# Allegro board BACKUP.brd
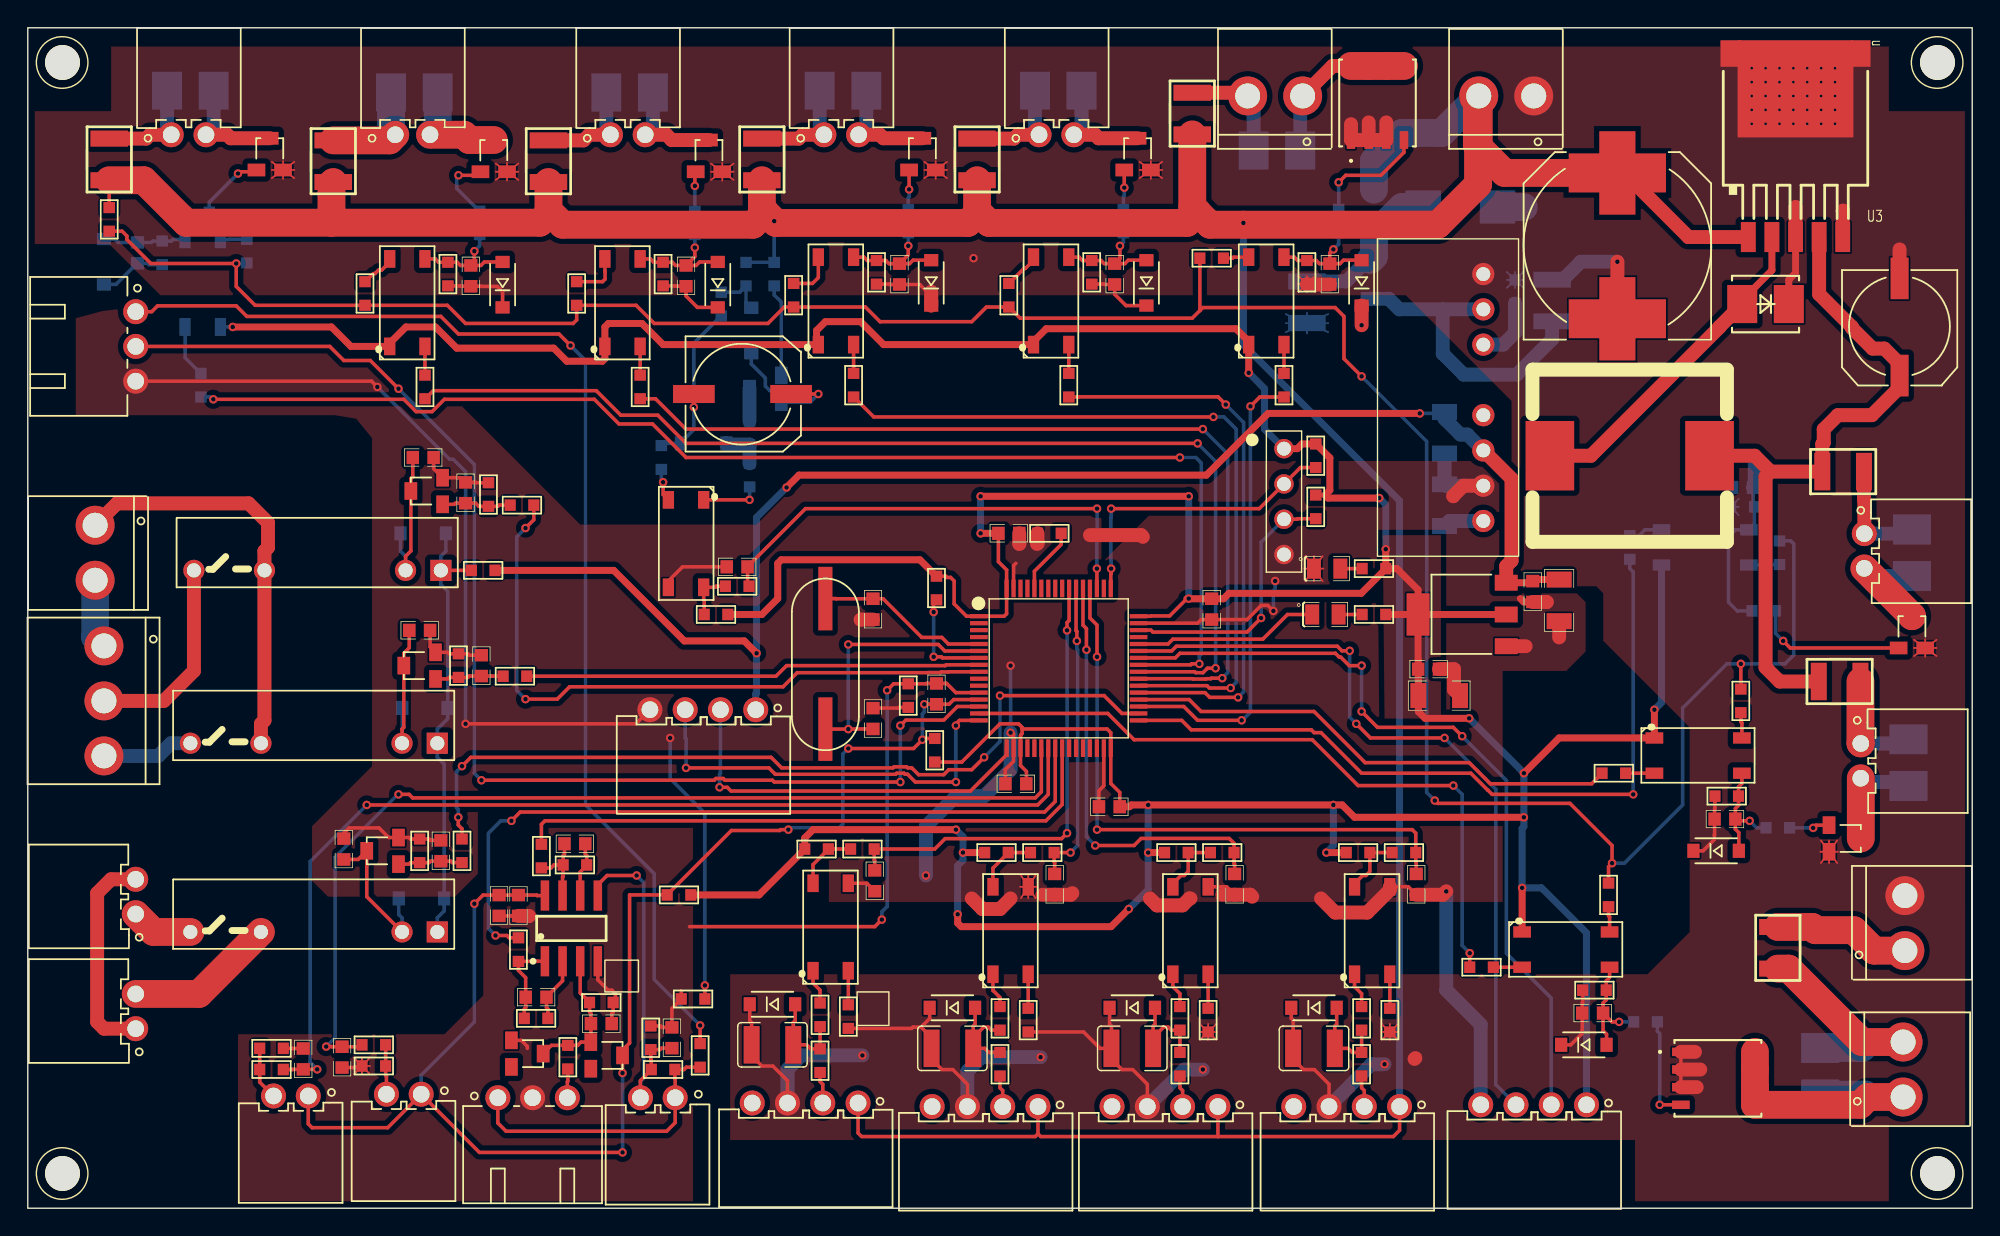
[diagram p0: board, top side]
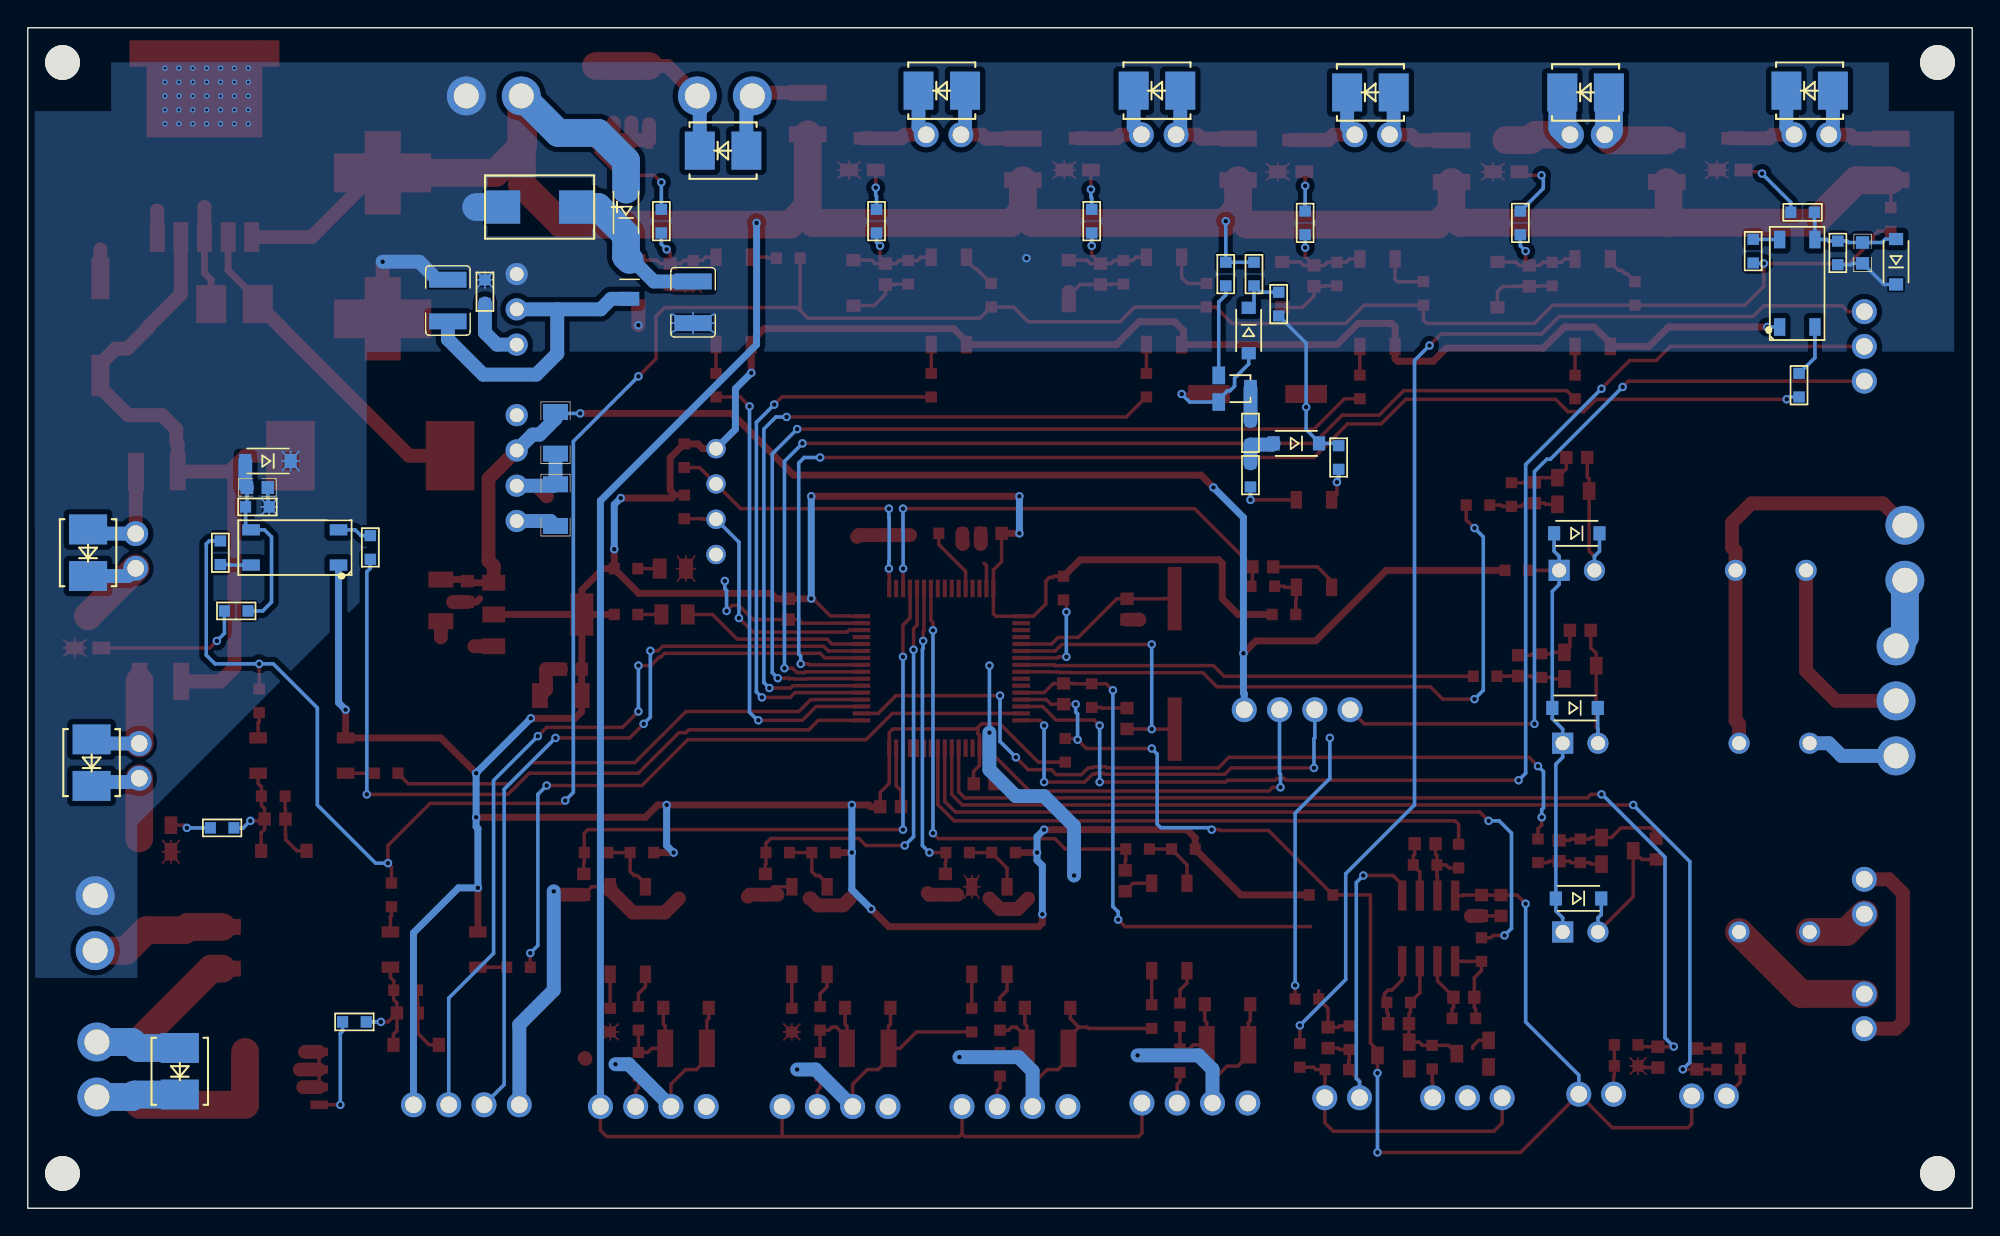
[diagram p1: board, bottom side, seen from below]

Outline 140 x 85 mm; copper layers: TOP, BOTTOM. Coordinates in mm from the lower left corner of the outline.
Outline path: rectangle 0,0 140,85

## Design rules (mm)
constraint set DEFAULT: min track width 0.127

## Placement (name value [footprint] x y rotation side)
C1  10u  [CTASMDCD_A_EC2917_EA7343_31]  103.15 72.09 0 bottom
C2  10u  [C1210]  92.1 65.23 270 bottom
C3  1uF/10%/50V  [C1210]  109.75 65.36 90 bottom
C4  100u/16V  [C1206]  102 55.84 270 bottom
C5  10uF/10%/35V  [C1206]  110.26 43.77 270 top
C6  100nF/10%/35V  [C0603]  108.35 44.41 270 top
C7  10uF/10%/35V  [C1206]  101.62 36.91 0 top
C8  100nF/10%/35V  [C0603]  100.86 38.82 0 top
C9  10uF/10%/35V  [C1206]  102 50.63 90 bottom
C10  470uF/50V  [CES13]  114.45 69.3 270 top
C11  220uF/25V  [CES8]  134.77 63.45 90 top
C12  100nF/10%/35V  [C0603]  77.87 28.91 180 top
C13  100nF/10%/35V  [C0603]  70.64 48.6 0 top
C14  100nF/10%/35V  [C0603]  85.24 43.13 270 top
C15  100nF/10%/35V  [C0603]  71.14 30.56 180 top
C16  22pF/10%/50V  [C0603]  60.86 43.13 90 top
C17  22pF/10%/50V  [C0603]  60.86 35.26 270 top
C22  100nF/10%/50V  [C0603]  65.43 37.04 90 top
C23  100nF/10%/35V  [C0603]  7.9 68.79 270 bottom
C24  100nF/10%/35V  [C0603]  31.9 67.14 270 top
C25  100nF/10%/35V  [C0603]  47.39 67.14 270 top
C26  100nF/10%/35V  [C0603]  62.76 67.27 270 top
C27  100nF/10%/35V  [C0603]  78.25 67.27 270 top
C28  100nF/10%/35V  [C0603]  122.2 28.02 180 top
C29  100nF/10%/35V  [C0603]  123.47 51.9 180 bottom
C30  100nF/10%/35V  [C0603]  93.75 67.27 270 top
C31  100nF/10%/35V  [C0603]  112.67 14.05 180 top
C32  100nF/10%/35V  [C0603]  22.76 25.86 90 top
C33  100nF/10%/35V  [C0603]  29.74 25.74 90 top
C34  100nF/10%/35V  [C0603]  28.47 54.06 0 top
C35  100nF/10%/35V  [C0603]  28.22 41.61 0 top
C36  100nF/10%/35V  [C0603]  31.52 51.52 90 top
C37  100nF/10%/35V  [C0603]  32.66 39.07 90 top
C38  22nF/10%/50V  [C1210]  53.62 11.77 0 top
C39  10nF/10%/50V  [C0603]  60.98 23.58 270 top
C40  22nF/10%/50V  [C1210]  66.57 11.51 0 top
C41  10nF/10%/50V  [C0603]  73.94 23.32 270 top
C42  220uF/25V  [CES8]  51.46 58.63 180 top
C43  10nF/10%/50V  [C0603]  51.08 46.18 180 top
C44  22pF  [C0603]  36.6 15.2 180 top
C45  1uF/10%/16V  [C0603]  33.93 21.8 270 top
C46  10nF/10%/50V  [C0603]  35.33 21.8 270 top
C47  22pF  [C0603]  41.3 13.29 180 top
C48  22pF  [C0603]  39.39 26.24 180 top
C49  22pF  [C0603]  46.38 12.27 270 top
C50  22pF  [C0603]  22.63 10.88 90 top
C51  22pF  [C0603]  19.84 10.75 270 top
C52  22nF/10%/50V  [C1210]  79.53 11.51 0 top
C53  10nF/10%/50V  [C0603]  86.89 23.32 270 top
C54  22nF/10%/50V  [C1210]  92.61 11.51 0 top
C55  10nF/10%/50V  [C0603]  99.97 23.32 270 top
D1  1N4007W  [SOD-123]  96.92 71.71 90 bottom
D2  SS54  [DO-214AA]  125.12 65.11 180 top
D3  GREEN  [LED0805]  92.61 46.06 0 top
D4  GREEN  [LED0805]  92.48 42.75 0 top
D5  SS34  [DO-214AA]  11.71 80.47 180 bottom
D6  SS34  [DO-214AA]  27.84 80.35 180 bottom
D7  SMF11CA  [SOD-123]  5.48 68.15 90 bottom
D8  SMF11CA  [SOD-123]  34.19 66.5 90 top
D9  SS34  [DO-214AA]  43.33 80.35 180 bottom
D10  SS34  [DO-214AA]  58.7 80.47 180 bottom
D11  SS34  [DO-214AA]  74.19 80.47 180 bottom
D12  SMF11CA  [SOD-123]  49.68 66.5 90 top
D13  SMF11CA  [SOD-123]  65.05 66.63 90 top
D14  SMF11CA  [SOD-123]  80.54 66.63 90 top
D15  SS34  [DO-214AA]  135.41 32.09 90 bottom
D16  SS34  [DO-214AA]  135.66 47.2 90 bottom
D17  SS34  [DO-214AA]  89.94 76.16 180 bottom
D18  SMF11CA  [SOD-123]  121.56 25.74 0 top
D19  SMF11CA  [SOD-123]  122.7 53.8 0 bottom
D20  SMF11CA  [SOD-123]  96.03 66.63 90 top
D21  MBR0540  [SOD-123]  28.34 22.31 0 bottom
D22  MBR0540  [DO-214AA]  129.06 9.86 90 bottom
D23  SMF11CA  [SOD-123]  112.04 11.77 0 top
D24  MBR0540  [SOD-123]  28.47 48.6 0 bottom
D25  MBR0540  [SOD-123]  28.6 36.02 0 bottom
D26  SMBJ7.5CA  [SOD-123]  53.62 14.69 0 top
D27  SMBJ7.5CA  [SOD-123]  66.57 14.43 0 top
D28  4148  [SOD-123]  52.09 63.2 270 bottom
D29  SMBJ7.5CA  [SOD-123]  48.66 55.07 0 bottom
D30  BAS116-7-F  [SOT-23]  42.82 11 270 top
D31  BAS116-7-F  [SOT-23]  37.11 11.13 270 top
D32  SMBJ7.5CA  [SOD-123]  79.53 14.43 0 top
D33  SMBJ7.5CA  [SOD-123]  92.61 14.43 0 top
J1  CON2  [CONN_TH_VH3_96_2A]  106.45 80.09 180 top
J2  LCD  [CONN_TH_XH2_54_4AW]  48.66 35.9 180 top
J3  TDS  [CONN_TH_XH2_54_4AW]  108.48 7.45 180 top
J4  SWD  [CON4P2_54]  90.45 49.61 0 top
J5  InputValue1  [CONN_TH_XH2_54_2AW]  11.58 77.3 0 top
J6  InputValue2  [CONN_TH_XH2_54_2AW]  27.71 77.3 0 top
J7  InputValue3  [CONN_TH_XH2_54_2AW]  43.2 77.3 0 top
J8  InputValue4  [CONN_TH_XH2_54_2AW]  58.57 77.3 0 top
J9  InputValue5  [CONN_TH_XH2_54_2AW]  74.06 77.3 0 top
J10  Pump1  [CONN_TH_XH2_54_2AW]  131.98 32.21 270 top
J11  Pump4  [CONN_TH_XH2_54_2AW]  132.23 47.33 270 top
J12  MixPump  [CONN_TH_VH3_96_2A]  89.81 80.09 180 top
J13  GasPumpPower  [CONN_TH_XH2_54_2AW]  7.77 22.43 90 top
J14  ElectrolyzerPower  [CONN_TH_VH3_96_2A]  135.15 20.53 90 top
J15  GasPump  [CONN_TH_XH2_54_2AW]  7.77 14.18 90 top
J16  Electrolyzer  [CONN_TH_VH3_96_2A]  135.02 9.99 90 top
J17  CON2  [CONN_TH_VH3_96_2A]  4.85 47.2 270 top
J18  Heater  [CONN_TH_VH3_96_3A]  5.48 36.53 270 top
J19  LiquidSensor1  [CONN_TH_XH2_54_4AW]  56.03 7.58 180 top
J20  LiquidSensor2  [CONN_TH_XH2_54_4AW]  68.98 7.32 180 top
J21  FlowSensor  [CONN_TH_XH2_54_3AW]  7.77 62.06 270 top
J22  ORP  [CONN_TH_XH2_54_3AW]  36.34 7.96 0 top
J23  Waterimmersion  [CONN_TH_XH2_54_2AW]  45.36 7.96 180 top
J24  WaterInNTC  [CONN_TH_XH2_54_2AW]  27.07 8.21 180 top
J25  WaterOutNTC  [CONN_TH_XH2_54_2AW]  18.95 8.08 180 top
J26  LiquidSensor3  [CONN_TH_XH2_54_4AW]  81.94 7.32 180 top
J27  LiquidSensor4  [CONN_TH_XH2_54_4AW]  95.02 7.32 180 top
L1  10uH/0.5A  [L10UH500MA]  96.67 66.88 270 bottom
L2  68uH  [L13_65X12_6]  115.34 54.18 0 top
NOREF  -  [unnamed]  137.5 82.5 0 top
NOREF#2  -  [#2]  2.5 82.5 0 top
NOREF#3  -  [#2]  137.5 2.5 90 top
NOREF#4  -  [unnamed]  2.5 82.5 0 top
NOREF#5  -  [unnamed]  137.5 2.5 0 top
NOREF#6  -  [unnamed]  2.5 2.5 0 top
NOREF#7  -  [#2]  0 85 0 top
NOREF#8  -  [#2]  0 0 90 top
Q1  SI2318DS  [SOT-23]  17.42 77.04 0 top
Q2  SI2318DS  [SOT-23]  33.55 76.92 0 top
Q3  SI2318DS  [SOT-23]  49.05 76.92 0 top
Q4  SI2318DS  [SOT-23]  64.41 77.04 0 top
Q5  SI2318DS  [SOT-23]  79.91 77.04 0 top
Q6  SI2318DS  [SOT-23]  131.98 26.62 270 top
Q7  SI2318DS  [SOT-23]  135.66 42.63 0 top
Q8  SIR422DP-T1-GE3  [POWERPAK_SO-8_SINGLE]  97.18 79.58 90 top
Q9  SIR422DP-T1-GE3  [POWERPAK_SO-8_SINGLE]  121.69 9.35 0 top
Q10  MMBT3906/SOT  [SOT-23]  51.97 59.01 270 bottom
R1  100K/0.1W/1%  [R0603]  107.08 66 270 bottom
R2  10K/1W/1%  [R0603]  65.43 44.66 90 top
R3  0ohm/0.1W/1%  [R0603]  73.56 48.6 180 top
R4  0ohm/0.1W/1%  [R0603]  65.3 32.98 90 top
R5  0ohm/0.1W/1%  [R0603]  63.4 36.91 90 top
R6  330/0.1W/1%  [R0603]  96.92 46.06 0 top
R7  330/0.1W/1%  [R0603]  96.92 42.75 0 top
R8  10K/1W/1%  [R0603]  92.73 50.5 90 top
R9  10K/1W/1%  [R0603]  92.73 54.18 90 top
R10  10K/0.1W/1%  [R0603]  15.77 68.92 90 bottom
R11  0/0.1W/1%  [R1210]  5.86 75.52 90 top
R12  10K/0.1W/1%  [R0603]  24.28 65.87 90 top
R13  0/0.1W/1%  [R1210]  21.99 75.39 90 top
R14  0ohm/0.1W/1%  [R0603]  5.86 71.2 90 top
R15  1K/0.1W/1%  [R0603]  12.47 59.26 270 bottom
R16  1K/0.1W/1%  [R0603]  28.6 59.14 270 top
R17  7.5K/0.1W/1%  [R0603]  9.67 68.79 270 bottom
R18  1K/0.1W/1%  [R0603]  12.22 71.71 0 bottom
R19  7.5K/0.1W/1%  [R0603]  30.25 67.27 270 top
R20  1K/0.1W/1%  [R0603]  32.53 70.95 90 bottom
R21  10K/0.1W/1%  [R0603]  39.52 65.87 90 top
R22  0/0.1W/1%  [R1210]  37.49 75.39 90 top
R23  10K/0.1W/1%  [R0603]  55.14 65.74 90 top
R24  0/0.1W/1%  [R1210]  52.86 75.52 90 top
R25  10K/0.1W/1%  [R0603]  70.64 65.74 90 top
R26  0/0.1W/1%  [R1210]  68.35 75.52 90 top
R27  1K/0.1W/1%  [R0603]  44.09 59.14 270 top
R28  1K/0.1W/1%  [R0603]  59.46 59.26 270 top
R29  1K/0.1W/1%  [R0603]  74.95 59.26 270 top
R30  7.5K/0.1W/1%  [R0603]  45.74 67.27 270 top
R31  1K/0.1W/1%  [R0603]  48.03 70.95 90 bottom
R32  7.5K/0.1W/1%  [R0603]  61.11 67.39 270 top
R33  1K/0.1W/1%  [R0603]  63.4 71.08 90 bottom
R34  7.5K/0.1W/1%  [R0603]  76.6 67.39 270 top
R35  1K/0.1W/1%  [R0603]  78.89 71.08 90 bottom
R36  10K/0.1W/1%  [R0603]  123.34 36.53 270 top
R37  0/0.1W/1%  [R1210]  130.45 37.93 0 top
R38  10K/0.1W/1%  [R0603]  126.13 47.2 270 bottom
R39  0/0.1W/1%  [R1210]  130.71 53.04 0 top
R40  10K/0.1W/1%  [R0603]  85.24 68.41 0 top
R41  0/0.1W/1%  [R1210]  83.84 78.82 90 top
R42  1K/0.1W/1%  [R0603]  114.2 31.32 180 top
R43  1K/0.1W/1%  [R0603]  115.34 47.58 270 bottom
R44  1K/0.1W/1%  [R0603]  90.45 59.26 270 top
R45  7.5K/0.1W/1%  [R0603]  122.32 29.67 180 top
R46  1K/0.1W/1%  [R0603]  126.01 27.39 0 bottom
R47  7.5K/0.1W/1%  [R0603]  123.47 50.5 180 bottom
R48  1K/0.1W/1%  [R0603]  124.99 43.01 0 bottom
R49  7.5K/0.1W/1%  [R0603]  92.1 67.39 270 top
R50  1K/0.1W/1%  [R0603]  94.38 71.08 90 bottom
R51  0/0.1W/1%  [R1210]  126.01 18.75 270 top
R52  10K/0.1W/1%  [R0603]  113.81 22.56 270 top
R53  1K/0.1W/1%  [R0603]  104.67 17.35 180 top
R54  1K/0.1W/1%  [R0603]  31.27 25.74 270 top
R55  7.5K/0.1W/1%  [R0603]  112.8 15.7 180 top
R56  1K/0.1W/1%  [R0603]  116.48 13.42 0 bottom
R57  10K/1W/1%  [R0603]  28.22 25.74 270 top
R58  0ohm/0.1W/1%  [R0603]  32.79 45.93 0 top
R59  1K/0.1W/1%  [R0603]  35.58 50.63 180 top
R60  1K/0.1W/1%  [R0603]  35.08 38.31 180 top
R61  10K/1W/1%  [R0603]  33.17 51.39 270 top
R62  10K/1W/1%  [R0603]  31.01 39.07 270 top
R63  10K/1W/1%  [R0603]  56.79 25.86 0 top
R64  10K/0.1W/1%  [R0603]  57.05 10.62 270 top
R65  330ohm/0.1W/1%  [R0603]  57.05 13.93 90 top
R66  100ohm/0.1W/1%  [R0603]  60.09 25.86 0 top
R67  330ohm/0.1W/1%  [R0603]  59.08 13.8 90 top
R68  10K/1W/1%  [R0603]  69.75 25.61 0 top
R69  10K/0.1W/1%  [R0603]  70 10.37 270 top
R70  330ohm/0.1W/1%  [R0603]  70 13.67 90 top
R71  100ohm/0.1W/1%  [R0603]  73.05 25.61 0 top
R72  330ohm/0.1W/1%  [R0603]  72.03 13.54 90 top
R73  33K/0.1W/1%  [R0603]  53.74 67.27 270 bottom
R74  10K/1W/1%  [R0603]  49.55 42.75 180 top
R75  2.5K/0.1W/1%  [R0603]  51.71 67.27 270 bottom
R76  2.5K/0.1W/1%  [R0603]  51.97 55.84 90 bottom
R77  330ohm/0.1W/1%  [R0603]  51.97 52.79 270 bottom
R78  100ohm/0.1W/1%  [R0603]  51.08 44.79 0 top
R79  33K/0.1W/1%  [R0603]  49.93 65.11 270 bottom
R80  330ohm/0.1W/1%  [R0603]  45.62 54.06 270 bottom
R81  0ohm/0.1W/1%  [R0603]  36.6 13.67 180 top
R82  0ohm/0.1W/1%  [R0603]  48.41 11 270 top
R83  10K/0.1W/1%  [R0603]  38.89 10.88 270 top
R84  1K/0.1W/1%  [R0603]  35.33 18.62 270 top
R85  0ohm/0.1W/1%  [R0603]  46.89 22.56 180 top
R86  10K/0.1W/1%  [R0603]  41.3 14.81 180 top
R87  0ohm/0.1W/1%  [R0603]  47.9 15.07 180 top
R88  10K/0.1W/1%  [R0603]  39.39 24.72 180 top
R89  10M/0.1W/1%  [R0603]  45.74 9.99 0 top
R90  1K/0.1W/1%  [R0603]  36.98 25.36 270 top
R91  10M/0.1W/1%  [R0603]  44.85 12.27 270 top
R92  100/0.1W/1%  [R0603]  24.91 11.77 180 top
R93  10K/0.1W/1%  [R0603]  24.91 10.24 0 top
R94  100/0.1W/1%  [R0603]  17.55 9.99 0 top
R95  10K/0.1W/1%  [R0603]  17.55 11.51 180 top
R96  10K/1W/1%  [R0603]  82.7 25.61 0 top
R97  10K/0.1W/1%  [R0603]  82.95 10.37 270 top
R98  330ohm/0.1W/1%  [R0603]  82.95 13.67 90 top
R99  100ohm/0.1W/1%  [R0603]  86 25.61 0 top
R100  330ohm/0.1W/1%  [R0603]  84.99 13.54 90 top
R101  10K/1W/1%  [R0603]  95.78 25.61 0 top
R102  10K/0.1W/1%  [R0603]  96.03 10.37 270 top
R103  330ohm/0.1W/1%  [R0603]  96.03 13.67 90 top
R104  100ohm/0.1W/1%  [R0603]  99.08 25.61 0 top
R105  330ohm/0.1W/1%  [R0603]  98.07 13.54 90 top
RL1  -  [APAN3105]  29.49 19.89 180 top
RL2  -  [APAN3105]  29.74 45.93 180 top
RL3  -  [APAN3105]  29.49 33.48 180 top
U1  PSM_WRB2405S-3WR2  [WRB2405S]  104.8 67.27 270 top
U2  LD1117  [SOT-223]  100.1 42.75 90 top
U3  LM2596  [TO-263]  127.28 75.27 270 top
U4  STM32F103RC  [LQFP-64]  68.48 42.63 0 top
U6  TPL181  [SOP-4]  13.87 63.45 90 bottom
U7  TPL181  [SOP-4]  26.06 62.06 90 top
U8  TPL181  [SOP-4]  41.55 62.06 90 top
U9  TPL181  [SOP-4]  56.92 62.19 90 top
U10  TPL181  [SOP-4]  72.41 62.19 90 top
U11  TPL181  [SOP-4]  117.12 33.86 0 top
U12  TPL181  [SOP-4]  117.62 46.31 0 bottom
U13  TPL181  [SOP-4]  87.91 62.19 90 top
U14  TPL181  [SOP-4]  107.59 19.89 0 top
U15  BSS138BEG  [SOT-23]  24.41 25.74 90 top
U16  BSS138BEG  [SOT-23]  27.58 51.64 90 top
U17  BSS138BEG  [SOT-23]  27.07 39.07 90 top
U18  TPL181  [SOP-4]  56.54 17.1 90 top
U19  TPL181  [SOP-4]  69.49 16.85 90 top
U20  TPL181  [SOP-4]  48.66 51.01 270 top
U21  MCP6292  [SOIC-8]  39.14 20.15 0 top
U22  TPL181  [SOP-4]  82.45 16.85 90 top
U23  TPL181  [SOP-4]  95.53 16.85 90 top
Y1  8M  [HC-49SMD]  57.43 43.9 270 top

## Library data of the parts
C1 = CAP_T_10uF/10%/50V: User Part Number: PN; Tolerance: TOL; room: pw5v
C2 = CAP_T_10uF/10%/50V: room: pw5v
C3 = CAP_1uF/10%/50V: room: pw5v
C4 = CAP_T_100uF/10%/16V: room: pw5v
C5-C8 = CAP NP: room: pw3v3
C9 = CAP NP: room: pw5v
C10 C11 = CAP POL: room: pw12v
C12-C17 = CAPACITOR NON-POL: room: mcu
C22 = 100nF/10%/50V: room: mcu
C23 = CAP NP: room: dcf1
C24 = CAP NP: room: dcf2
C25 = CAP NP: room: dcf3
C26 = CAP NP: room: dcf4
C27 = CAP NP: room: dcf5
C28 = CAP NP: room: 12dcf1
C29 = CAP NP: room: 12dcf2
C30 = CAP NP: room: sodcf1
C31 = CAP NP: room: sodcf2
C32 C33 = CAP NP: room: rly1
C34-C37 = CAP NP: room: heater1
C38 C39 = CAPACITOR NON-POL: room: lqsen1
C40 C41 = CAPACITOR NON-POL: room: lqsen2
C42 = CAP POL: room: pwdec
C43 = CAPACITOR NON-POL: room: pwdec
C44 C47-C49 = 22pF/5%/50V: room: ai
C45 = 1uF/10%/16V: room: ai
C46 = 10nF/10%/50V: room: ai
C50 C51 = 22pF/5%/50V: room: heater2
C52 C53 = CAPACITOR NON-POL: room: lqsen3
C54 C55 = CAPACITOR NON-POL: room: lqsen4
D1 = DIODE S1M/1000V: room: pw5v
D2 = DIODE SCHOTTKY: User Part Number: PN; Tolerance: TOL; room: pw12v
D3 D4 = LN222RPH
D5 = UNI-DIRECTIONAL: User Part Number: PN; Tolerance: TOL; room: dcf1
D6 = UNI-DIRECTIONAL: User Part Number: PN; Tolerance: TOL; room: dcf2
D7 = DIODE ZENER: room: dcf1
D8 = DIODE ZENER: room: dcf2
D9 = UNI-DIRECTIONAL: User Part Number: PN; Tolerance: TOL; room: dcf3
D10 = UNI-DIRECTIONAL: User Part Number: PN; Tolerance: TOL; room: dcf4
D11 = UNI-DIRECTIONAL: User Part Number: PN; Tolerance: TOL; room: dcf5
D12 = DIODE ZENER: room: dcf3
D13 = DIODE ZENER: room: dcf4
D14 = DIODE ZENER: room: dcf5
D15 = UNI-DIRECTIONAL: User Part Number: PN; Tolerance: TOL; room: 12dcf1
D16 = UNI-DIRECTIONAL: User Part Number: PN; Tolerance: TOL; room: 12dcf2
D17 = UNI-DIRECTIONAL: User Part Number: PN; Tolerance: TOL; room: sodcf1
D18 = DIODE ZENER: room: 12dcf1
D19 = DIODE ZENER: room: 12dcf2
D20 = DIODE ZENER: room: sodcf1
D21 = UNI-DIRECTIONAL: room: rly1
D22 = UNI-DIRECTIONAL: User Part Number: PN; Tolerance: TOL; room: sodcf2
D23 = DIODE ZENER: room: sodcf2
D24 D25 = UNI-DIRECTIONAL: room: heater1
D26 = TVS: room: lqsen1
D27 = TVS: room: lqsen2
D28 = UNI-DIRECTIONAL: room: pwdec
D29 = TVS: room: pwdec
D30 D31 = BAS116-7-F: room: ai
D32 = TVS: room: lqsen3
D33 = TVS: room: lqsen4
J1 J8 J17 = CON2
J2-J4 = CON4
J5 = CON2: room: dcf1
J6 = CON2: room: dcf2
J7 = CON2: room: dcf3
J9 = CON2: room: dcf5
J10 = CON2: room: 12dcf1
J11 = CON2: room: 12dcf2
J12 = CON2: room: sodcf1
J13 J15 = CON2: room: rly1
J14 J16 = CON2: room: sodcf2
J18 J21 = CON3
J19 = CON4: room: lqsen1
J20 = CON4: room: lqsen2
J22 = CON3: room: ai
J23 = CON2: room: ai
J24 J25 = CON2: room: heater2
J26 = CON4: room: lqsen3
J27 = CON4: room: lqsen4
L1 = INDUCTOR_10UH/0.5A: room: pw5v
L2 = CHOKE: room: pw12v
Q1 = IRF250: room: dcf1
Q2 = IRF250: room: dcf2
Q3 = IRF250: room: dcf3
Q4 = IRF250: room: dcf4
Q5 = IRF250: room: dcf5
Q6 = IRF250: room: 12dcf1
Q7 = IRF250: room: 12dcf2
Q8 = SIR422DP-T1-GE3: User Part Number: PN; Tolerance: TOL; room: sodcf1
Q9 = SIR422DP-T1-GE3: User Part Number: PN; Tolerance: TOL; room: sodcf2
Q10 = MMBT3906/SOT: room: pwdec
R1 = RES_100K/0.1W/1%: room: pw5v
R2 = R2: room: mcu
R3-R5 R8 R9 R14 R82 R85 R87 = R2
R6 R7 = RES_330R/0.1W/1%
R10 R11 R15 R17 R18 = R2: room: dcf1
R12 R13 R16 R19 R20 = R2: room: dcf2
R21 R22 R27 R30 R31 = R2: room: dcf3
R23 R24 R28 R32 R33 = R2: room: dcf4
R25 R26 R29 R34 R35 = R2: room: dcf5
R36 R37 R42 R45 R46 = R2: room: 12dcf1
R38 R39 R43 R47 R48 = R2: room: 12dcf2
R40 R41 R44 R49 R50 = R2: room: sodcf1
R51-R53 R55 R56 = R2: room: sodcf2
R54 R57 = R2: room: rly1
R58-R62 = R2: room: heater1
R63-R67 = R2: room: lqsen1
R68-R72 = R2: room: lqsen2
R73-R80 = R2: room: pwdec
R81 R83 R84 R86 R88-R91 = RES_10K/0.1W/1%: room: ai
R92-R95 = RES_10K/0.1W/1%: room: heater2
R96-R100 = R2: room: lqsen3
R101-R105 = R2: room: lqsen4
RL1 = APAN3105: room: rly1
RL2 RL3 = APAN3105: room: heater1
U1 = PSM_WRB2405S-3WR2: room: pw5v
U2 = LD1117: room: pw3v3
U3 = LM2596: User Part Number: PN; Tolerance: TOL; room: pw12v
U4 = IC_MCU_STM32F103RC: room: mcu
U6 = TLP181: room: dcf1
U7 = TLP181: room: dcf2
U8 = TLP181: room: dcf3
U9 = TLP181: room: dcf4
U10 = TLP181: room: dcf5
U11 = TLP181: room: 12dcf1
U12 = TLP181: room: 12dcf2
U13 = TLP181: room: sodcf1
U14 = TLP181: room: sodcf2
U15 = N-MOS: room: rly1
U16 U17 = N-MOS: room: heater1
U18 = TPL181: room: lqsen1
U19 = TPL181: room: lqsen2
U20 = TPL181: room: pwdec
U21 = OPA_MCP6292_1: User Part Number: partnum; Tolerance: RichardLC; room: ai
U22 = TPL181: room: lqsen3
U23 = TPL181: room: lqsen4
Y1 = Crystal: room: mcu

## Footprints (pads in the part's own frame, mm; a bottom-side part is the same pattern mirrored in y, then rotated)
APAN3105
  rect 1.524x1.524 hole 1.016: 1(0,0)
  round 1.524 hole 1.016: 2(2.54,0) 3(12.7,0) 4(17.78,0)
C0603
  rect 0.9x0.95 smd: 1(-0.75,0) 2(0.75,0)
C1206
  rect 1.15x1.8 smd: 1(-1.5,0) 2(1.5,0)
C1210
  rect 1.15x2.7 smd: 1(-1.5,0) 2(1.5,0)
CES8
  rect 3x1.3 smd: 1(-3.5,0) 2(3.5,0)
CES13
  custom 6x7 smd: 1(-5.25,0) 2(5.25,0)
CON4P2_54
  round 1.4 hole 1: 1(0,5.08) 2(0,2.54) 3(0,0) 4(0,-2.54)
CONN_TH_VH3_96_2A
  round 2.8 hole 1.8: 1(-1.98,0) 2(1.98,0)
CONN_TH_VH3_96_3A
  round 2.8 hole 1.8: 1(-3.96,0) 2(0,0) 3(3.96,0)
CONN_TH_XH2_54_2AW
  round 1.8 hole 1.2: 1(-1.251,0) 2(1.251,0)
CONN_TH_XH2_54_3AW
  round 1.8 hole 1.2: 1(-2.5,0) 2(0.002,0) 3(2.504,0)
CONN_TH_XH2_54_4AW
  round 1.8 hole 1.2: 1(-3.75,0) 2(-1.21,0) 3(1.33,0) 4(3.87,0)
CTASMDCD_A_EC2917_EA7343_31
  rect 2.55x2.4 smd: 1(-2.675,0) 2(2.675,0)
DO-214AA
  rect 2.159x2.743 smd: 1(-1.676,0) 2(1.676,0)
HC-49SMD
  rect 4.572x1.016 smd: 1(0,0) 2(9.398,0)
L10UH500MA
  rect 1x1.4 smd: 1(-1.4,0) 2(1.4,0)
L13_65X12_6
  rect 3.5x5 smd: 1(-5.75,0) 2(5.75,0)
LED0805
  rect 1x1.45 smd: 1(0,0) 2(1.9,0)
LQFP-64
  rect 1.27x0.305 smd: 1(0,0) 2(0,-0.5) 3(0,-1) 4(0,-1.5) 5(0,-2) 6(0,-2.5) 7(0,-3) 8(0,-3.5) 9(0,-4) 10(0,-4.5) 11(0,-5) 12(0,-5.5) 13(0,-6) 14(0,-6.5) 15(0,-7) 16(0,-7.5) 33(11.5,-7.5) 34(11.5,-7) 35(11.5,-6.5) 36(11.5,-6) 37(11.5,-5.5) 38(11.5,-5) 39(11.5,-4.5) 40(11.5,-4) 41(11.5,-3.5) 42(11.5,-3) 43(11.5,-2.5) 44(11.5,-2) 45(11.5,-1.5) 46(11.5,-1) 47(11.5,-0.5) 48(11.5,0)
  rect 0.305x1.27 smd: 17(2,-9.5) 18(2.5,-9.5) 19(3,-9.5) 20(3.5,-9.5) 21(4,-9.5) 22(4.5,-9.5) 23(5,-9.5) 24(5.5,-9.5) 25(6,-9.5) 26(6.5,-9.5) 27(7,-9.5) 28(7.5,-9.5) 29(8,-9.5) 30(8.5,-9.5) 31(9,-9.5) 32(9.5,-9.5) 49(9.5,2) 50(9,2) 51(8.5,2) 52(8,2) 53(7.5,2) 54(7,2) 55(6.5,2) 56(6,2) 57(5.5,2) 58(5,2) 59(4.5,2) 60(4,2) 61(3.5,2) 62(3,2) 63(2.5,2) 64(2,2)
POWERPAK_SO-8_SINGLE
  rect 1.27x0.61 smd: 1(-2.667,1.905) 2(-2.667,0.635) 3(-2.667,-0.635) 4(-2.667,-1.905) 5(2.667,-1.905) 6(2.667,-0.635) 7(2.667,0.635) 8(2.667,1.905)
R0603
  rect 0.8x0.83 smd: 1(-0.85,0) 2(0.85,0)
R1210
  rect 1.15x2.7 smd: 1(-1.5,0) 2(1.5,0)
SOD-123
  rect 0.88x1.02 smd: 1(-1.635,0) 2(1.635,0)
SOIC-8
  rect 0.61x2.17 smd: 1(-1.905,-2.365) 2(-0.635,-2.365) 3(0.635,-2.365) 4(1.905,-2.365) 5(1.905,2.365) 6(0.635,2.365) 7(-0.635,2.365) 8(-1.905,2.365)
SOP-4
  rect 1.27x0.813 smd: 1(0,0) 3(0,-2.54) 4(6.299,-2.54) 6(6.299,0)
SOT-23
  rect 1.27x0.914 smd: 1(-0.958,-2.285) 2(0.958,-2.285) 3(0,0)
SOT-223
  rect 1.143x1.651 smd: 1(-2.286,-6.35) 2(0,-6.35) 3(2.286,-6.35)
  rect 3.048x1.651 smd: 4(0,0)
TO-263
  rect 2.16x1.07 smd: 1(5.338,-3.4) 2(5.338,-1.7) 3(5.338,0.005) 4(5.338,1.7) 5(5.338,3.4)
  rect 6.99x8.33 smd: 6(-5.338,0)
unnamed
  round 2.5 hole 3.1 unplated: (0,0)
WRB2405S
  round 1.6 hole 1: 1(0,0) 2(2.54,0) 3(5.08,0) 4(10.16,0) 5(12.7,0) 6(15.24,0) 7(17.78,0)

## Nets
+5V: J21.1 R82.1
AVCC_+3V3: C22.1 C45.1 C46.1 D30.3 J24.1 J25.1 R4.2 R85.2 U4.13 U21.8
GND: C4.2 C5.2 C6.2 C7.2 C8.2 C9.2 C12.2 C13.2 C14.2 C15.2 C16.1 C17.1 C32.2 C33.2 C34.2 C35.2 C36.2 C37.2 C39.2 C41.2 C43.2 C53.2 C55.2 D3.1(CATHODE) J2.4 J3.4 J4.4 J21.3 R3.2 R5.1 R57.1 R61.1 R62.1 R87.1 U1.6 U2.1 U4.18(VSS_4) U4.31 U4.47 U4.63 U15.2(S) U16.2(S) U17.2(S) U18.4(EMITTER) U19.4(EMITTER) U20.4(EMITTER) U22.4(EMITTER) U23.4(EMITTER)
GND_FIELD SIGNAL: J13.2 J15.1
GND_SIGNAL: C22.2 C45.2 C46.2 C47.1 C49.1 C50.1 C51.1 D31.1 J22.2 R5.2 R86.1 R87.2 R91.1 R93.1 R95.1 U4.12 U21.4
VCC_+3V: J14.1 R51.1
VCC_+3V3: C7.1 C8.1 C12.1 C13.1 C14.1 C15.1 J3.1 J4.1 R2.2 R4.1 R6.2 R7.2 R8.2 R9.2 R63.1 R68.1 R74.1 R85.1 R96.1 R101.1 U2.2 U2.4 U4.1 U4.19 U4.32 U4.48 U4.64 U6.1 U7.1 U8.1 U9.1 U10.1 U11.1 U12.1 U13.1 U14.1
VCC_+5V: C4.1 C5.1 C6.1 J2.1 R58.2 U1.5 U2.3(VIN)
VCC_+5VREL: D21.2 D24.2 D25.2 R58.1 RL1.1 RL2.1 RL3.1
VCC_+12V: C11.1 L2.2 R37.1 R39.1 U3.4
VCC_+24V: C10.1 D1.2 J1.2 J19.1 J20.1 J26.1 J27.1 R11.1 R13.1 R14.2 R22.1 R24.1 R26.1 R41.1 R73.1 R75.1 U3.1(VIN2)
VCC_+REL: R10.1 R12.1 R14.1 R21.1 R23.1 R25.1 R36.1 R38.1 R40.1 R52.1
0: C1.2 C2.2 C3.2 C10.2 C11.2 C23.2 C24.2 C25.2 C26.2 C27.2 C28.2 C29.2 C30.2 C31.2 C38.1 C40.1 C42.2 C52.1 C54.1 D2.1 D7.1 D8.1 D12.1 D13.1 D14.1 D18.1 D19.1 D20.1 D23.1 D26.1 D27.1 D29.1 D32.1 D33.1 J1.1 J14.2 J19.3 J20.3 J26.3 J27.3 Q1.2(SOURCE) Q2.2(SOURCE) Q3.2(SOURCE) Q4.2(SOURCE) Q5.2(SOURCE) Q6.2(SOURCE) Q7.2(SOURCE) Q8.1 Q8.2 Q8.3 Q9.1 Q9.2 Q9.3 R1.1 R17.2 R19.2 R30.2 R32.2 R34.2 R45.2 R47.2 R49.2 R55.2 R67.1 R72.1 R79.2 R80.1 R100.1 R105.1 U1.1 U3.3 U3.5 U3.6
A_+5V: J22.1 J23.1 R82.2 R89.2
AC_L: J17.1 RL2.3(NO) RL3.3(NO)
AC_L1: J18.2 RL2.4
AC_L2: J18.3 RL3.4
AC_N: J17.2 J18.1
ADC_NTC1_IN: C50.2 R92.2 U4.22
ADC_NTC2_IN: C51.2 R94.2 U4.23
ADC_ORP_IN: R84.1 U4.24
ADC_WATER_IMMERSION_IN: R90.1 U4.25
ELECTROLYZER_CTRL: R53.2 U4.15
FLOW_SENSON_IN: J21.2 U4.14
HEATER_LEVEL1_CTRL: R60.1 U4.8
HEATER_LEVEL2_CTRL: R59.1 U4.9
LCD_RX: J2.2 U4.17
LCD_TX: J2.3 U4.16
LED1: D4.1(CATHODE) U4.44
LIQUID_SENSOR_1: J19.2 R64.2
LIQUID_SENSOR_1_IN: C39.1 R66.2 U4.55
LIQUID_SENSOR_2: J20.2 R69.2
LIQUID_SENSOR_2_IN: C41.1 R71.2 U4.54
LIQUID_SENSOR_3: J26.2 R97.2
LIQUID_SENSOR_3_IN: C53.1 R99.2 U4.53
LIQUID_SENSOR_4: J27.2 R102.2
LIQUID_SENSOR_4_IN: C55.1 R104.2 U4.52
OSC_IN: C16.2 U4.5 Y1.1
OSC_OUT: C17.2 U4.6 Y1.2(OSC2)
POWER_DETEC: C43.1 R78.2 U4.51
PUMP_1_CTRL: R42.2 U4.36
PUMP_2_CTRL: R44.2 U4.35
PUMP_3_CTRL: R54.1 U4.34
PUMP_4_CTRL: R43.2 U4.33
PUMP_+5V: J13.1 RL1.4
SWCLK: J4.2 R9.1 U4.49
SWDIO: J4.3 R8.1 U4.46
TDS_RX: J3.2 U4.42
TDS_TX: J3.3 U4.43
VALVE_1_CTRL: R15.2 U4.41
VALVE_2_CTRL: R16.2 U4.40
VALVE_3_CTRL: R27.2 U4.39
VALVE_4_CTRL: R28.2 U4.38
VALVE_5_CTRL: R29.2 U4.37
N1202581: D2.2(CATHODE) L2.1 U3.2
N16762968: R3.1 U4.60
N16765775: D3.2 R6.1
N16765835: D4.2 R7.1
N16766298: C1.1 C2.1 D1.1(K) L1.1
N16766318: C3.1 L1.2 U1.2(VIN)
N16766426: R1.2 U1.3
N16766430: C9.1 U1.7
N16767366: R2.1 U4.7
N16771027: D6.2 J6.1 R13.2
N16771125: R12.2 U7.6
N16771129: D6.1 J6.2 Q2.3
N16771225: R16.1 U7.3
N16771233: C24.1 D8.2(CATHODE) R19.1 R20.1 U7.4(EMITTER)
N16771535: Q2.1 R20.2
N16774684: D11.2 J9.1 R26.2
N16774692: R25.2 U10.6
N16774818: R29.1 U10.3
N16774822: C27.1 D14.2(CATHODE) R34.1 R35.1 U10.4(EMITTER)
N16774826: D11.1 J9.2 Q5.3
N16774976: Q5.1 R35.2
N16776418: D5.2 J5.1 R11.2
N16776426: R10.2 U6.6
N16776552: R15.1 U6.3
N16776556: C23.1 D7.2(CATHODE) R17.1 R18.1 U6.4(EMITTER)
N16776560: D5.1 J5.2 Q1.3
N16776710: Q1.1 R18.2
N16777249: D10.2 J8.1 R24.2
N16777253: R23.2 U9.6
N16777316: R28.1 U9.3
N16777318: C26.1 D13.2(CATHODE) R32.1 R33.1 U9.4(EMITTER)
N16777320: D10.1 J8.2 Q4.3
N16777395: Q4.1 R33.2
N16779192: D9.2 J7.1 R22.2
N16779196: R21.2 U8.6
N16779259: R27.1 U8.3
N16779261: C25.1 D12.2(CATHODE) R30.1 R31.1 U8.4(EMITTER)
N16779263: D9.1 J7.2 Q3.3
N16779338: Q3.1 R31.2
N16783805: R63.2 R66.1 U18.6
N16783821: C38.2 D26.2(CATHODE) R64.1 R65.1
N16783829: R65.2 U18.1
N16783895: R67.2 U18.3
N16784460: R68.2 R71.1 U19.6
N16784478: C40.2 D27.2(CATHODE) R69.1 R70.1
N16784486: R70.2 U19.1
N16784560: R72.2 U19.3
N16784997: C44.1 R81.1 U21.2
N16785001: C44.2 R81.2 R84.2 U21.1
N16785064: C47.2 D30.1 D31.3 R83.1 R86.2 U21.3
N16785092: C48.1 R88.1 U21.6
N16785096: C48.2 R88.2 R90.2 U21.7(OUT2)
N16785187: C49.2 J23.2 R89.1 R91.2 U21.5
N16785621: J22.3 R83.2
N16787769: D15.2 J10.1 R37.2
N16787781: R36.2 U11.6
N16787797: D16.2 J11.1 R39.2
N16787801: R38.2 U12.6
N16787827: D17.2 J12.2 R41.2
N16787853: R40.2 U13.6
N16787906: R42.1 U11.3
N16787908: C28.1 D18.2(CATHODE) R45.1 R46.1 U11.4(EMITTER)
N16787947: D15.1 J10.2 Q6.3
N16787951: R43.1 U12.3
N16787953: C29.1 D19.2(CATHODE) R47.1 R48.1 U12.4(EMITTER)
N16787969: D16.1 J11.2 Q7.3
N16788018: R44.1 U13.3
N16788044: D17.1 J12.1 Q8.5 Q8.6 Q8.7 Q8.8
N16788107: C30.1 D20.2(CATHODE) R49.1 R50.1 U13.4(EMITTER)
N16788186: Q6.1 R46.2
N16788215: Q7.1 R48.2
N16788887: D22.2 J16.2 R51.2
N16788891: R52.2 U14.6
N16788954: R53.1 U14.3
N16788956: C31.1 D23.2(CATHODE) R55.1 R56.1 U14.4(EMITTER)
N16788958: D22.1 J16.1 Q9.5 Q9.6 Q9.7 Q9.8
N16789033: Q9.4 R56.2
N16790896: R74.2 R78.1 U20.6
N16790906: Q10.3 R76.2
N16790908: D29.2(CATHODE) R76.1 R77.1
N16790916: R77.2 U20.1
N16790968: R80.2 U20.3
N16791201: D28.1 R75.2 R79.1
N16791208: C42.1 D28.2 Q10.2(E)
N16791364: Q10.1 R73.2
N16792370: C34.1 D24.1 RL2.2 U16.3
N16792403: C36.1 R59.2 R61.2 U16.1
N16792647: C35.1 D25.1 RL3.2 U17.3
N16792680: C37.1 R60.2 R62.2 U17.1
N16796996: J24.2 R92.1 R93.2
N16797225: J25.2 R94.1 R95.2
N16806147: J15.2 RL1.3(NO)
N16806158: C32.1 D21.1 RL1.2 U15.3
N16806191: C33.1 R54.2 R57.2 U15.1
N16813290: Q8.4 R50.2
N16835479: R96.2 R99.1 U22.6
N16835497: C52.2 D32.2(CATHODE) R97.1 R98.1
N16835505: R98.2 U22.1
N16835579: R100.2 U22.3
N16835647: R101.2 R104.1 U23.6
N16835665: C54.2 D33.2(CATHODE) R102.1 R103.1
N16835673: R103.2 U23.1
N16835747: R105.2 U23.3

Pads without a net: D30 2; D31 2; J19 4; J20 4; J26 4; J27 4; U1 4; U4 2 3 4 10 11 20 21 26 27 28 29 30 45 50 56 57 58 59 61 62

## Via types
v1: diameter 0.61, hole 0.33, TOP to BOTTOM, 139 vias
v2: diameter 0.406, hole 0.203, TOP to BOTTOM, 35 vias

## Routing (per net, layer and track width the routed paths; a pad name or vN(x,y) marks a point on that pad's centre or on a via; arc(x,y) is an arc through that point)
+5V: length 86.8
  TOP w0.254: v1(39.08,62.12) 38.25,62.95 31.01,62.95 29.74,64.22 15.77,64.22 15.01,64.98 9.34,64.98 8.92,64.56 J21.1 ; R82.1 v1(48.41,13.16)
  BOTTOM w0.254: v1(39.08,62.12) 40.16,61.04 40.16,29.04 45.11,24.09 45.11,16.46 v1(48.41,13.16)
AVCC_+3V3: length 103.2
  TOP w0.254: v1(54.76,27.26) 54.2,27.26 54.14,27.2 50.66,27.2 46.04,22.58 R85.2 43.33,22.56 43.33,11.89 42.82,11.39 D30.3 v1(42.82,9.73) ; J25.1 20.2,6.07 20.47,5.8 25.91,5.8 J24.1 32.52,4.02 v1(42.82,4.02) ; U4.13 66.67,36.63 66.33,36.29 C22.1 v1(64.55,36.29) ; R4.2 64.5,33.83 v1(64.41,33.74) 63.78,33.1 v1(59.08,33.1) ; U21.8 36.67,22.51 36.64,22.55 C46.1 C45.1 32.78,22.55 v1(32.15,21.93)
  BOTTOM w0.254: J24.1 28.33,9.59 32.15,13.42 v1(32.15,21.93) ; v1(59.08,33.1) 58.68,32.71 58.68,27.66 58.43,27.4 54.9,27.4 v1(54.76,27.26) ; v1(64.55,36.29) 64.55,35.73 64.41,35.59 v1(64.41,33.74) ; v1(42.82,9.73) v1(42.82,4.02)
GND: length 224.1
  TOP w0.127: D3.1 93.23,45.15 ; D3.1 91.93,46.06 ; D3.1 92.61,45.15 ; D3.1 91.98,46.96 ; D3.1 91.98,45.15 ; D3.1 93.28,46.06 ; D3.1 93.23,46.96 ; D3.1 92.61,46.96 ; 71.45,23.15 U19.4 ; U19.4 72.55,23.96 ; U19.4 72.03,22.33 ; U19.4 72.55,22.33 ; U19.4 72.62,23.15 ; U19.4 71.51,23.96 ; U19.4 71.51,22.33 ; U19.4 72.03,23.96
  TOP w0.254: C12.2 77.12,30.07 77.48,30.42 U4.31 ; U4.47 84.22,42.13 84.48,42.38 87.78,42.38 88.8,43.4 89.29,43.4 v1(89.69,43.01) ; C34.2 29.22,53.25 U16.2 31.18,52.6 C36.2 32.25,52.27 32.27,52.24 R61.1 ; U22.4 86.32,23.15 C53.2 ; C35.2 28.97,40.42 29.36,40.03 30.23,40.03 30.34,39.92 31.68,39.92 31.78,39.82 C37.2 ; C55.2 99.4,23.15 U23.4 ; v1(31.52,34.88) 43.78,34.88 J2.4 ; C33.2 28.99,26.49 28.89,26.59 R57.1 27.55,26.59 27.44,26.69 U15.2 25.98,26.69 25.29,27.39 23.14,27.39 22.76,27.01 C32.2 ; U20.4 46.12,45.17 47.14,46.18 C43.2 ; C15.2 70.39,31.29 70.38,31.3 70.38,31.58 70.98,32.17 U4.18 70.98,34.16 70.89,34.24 v1(70.76,34.24) ; U4.63 70.98,46.27 71.14,46.44 ; v1(25.17,59.14) 24.75,59.55 J21.3 ; C17.1 62.68,36.01 62.73,36.06 R5.1 ; R87.1 v1(48.75,16.05) ; C39.2 60.41,23.4 U18.4
  TOP w0.5: 107.47,43.9 107.71,43.66 C6.2
  TOP w1: C8.2 102.69,38.82 102.69,37.35 C7.2 ; 67.97,22.31 68.73,21.55 70,21.55 70.76,22.31 ; 109.37,43.64 109.36,43.66 C6.2 ; 60.86,42.38 59.98,42.38 59.97,42.37 ; 86.02,22.57 C53.2 88.02,22.57 88.16,22.43 ; 80.8,22.31 81.3,21.81 83.14,21.81 83.64,22.31 83.72,22.31 ; 75.21,22.69 75.09,22.57 C41.2 73.07,22.57 ; 76.48,48.47 80.16,48.47 80.29,48.34 ; v1(102.13,22.82) 101.89,22.57 C55.2 ; U23.4 98.07,22.92 96.44,21.29 94.13,21.29 93.11,22.31 ; R3.2 72.71,47.87 72.67,47.83 ; 102.64,51.26 102.64,51.29 103.37,52.02 U1.6 ; C13.2 71.39,47.85 71.4,47.83 ; C5.2 110.26,41.1 ; U2.1 107.85,40.47
  BOTTOM w0.254: v1(89.81,45.17) 89.81,44.61 89.69,44.48 v1(89.69,43.01) ; v1(70.76,34.24) v1(70.76,39.07) ; v1(46.25,33.86) 46.25,30.94 48.75,28.44 v1(48.75,16.05) ; v1(31.52,34.88) 31.52,53.04 30.63,53.93 30.38,53.93 v1(25.17,59.14)
  BOTTOM w1: v1(64.67,23.96) 64.67,27.51 66.83,29.67 68.86,29.67 70.76,31.58 v1(70.76,34.24) ; v1(102.13,22.82) 102.13,15.7 104.61,13.22 J3.4 ; U1.6 102.11,52.02 C9.2 C4.2
GND_FIELD SIGNAL: length 15.4
  TOP w1: 7.77,23.68 6,23.68 5,22.68 5,13.42 5.48,12.93 J15.1
GND_SIGNAL: length 59.8
  TOP w0.127: 24.06,9.65 R93.1 ; R93.1 24.64,10.84 ; R93.1 24.06,10.84 ; R93.1 23.49,10.84 ; R93.1 23.49,10.24 ; R93.1 23.49,9.65 ; R93.1 24.64,9.65 ; R93.1 24.64,10.24
  TOP w0.254: 35.96,11.51 35.96,11.66 35.53,12.09 D31.1 ; 22.63,10.13 23.95,10.13 R93.1 ; R91.1 45.55,13.12 45.65,13.02 C49.1 46.38,14.38 47.05,15.05 R87.2 47.05,15.66 ; C46.2 C45.2 ; C47.1 42.05,14.02 42.15,14.12 R86.1 42.31,14.98 42.31,15.45 42.06,15.7 41.78,15.7 41.04,16.44 U21.4 ; U4.12 66.82,37.13 66.16,37.79 C22.2 64.7,37.79 64.67,37.76 R5.2 62.34,37.76 v1(61.87,37.29) ; C51.1 19.06,11.5 19.05,11.51 R95.1 ; 47.65,20.27 60.98,20.27 v1(61.49,20.78)
  TOP w1: C46.2 36.08,21.05 36.09,21.04
  BOTTOM w0.254: v1(61.49,20.78) 61.49,21.34 61.87,21.72 v1(61.87,37.29)
VCC_+3V: length 9.8
  TOP w2: R51.1 128.48,20.25 128.71,20.02 131.47,20.02 132.94,18.55 J14.1
VCC_+3V3: length 379.3
  TOP w0.254: R4.1 67.24,32.12 70,34.88 71.34,34.88 71.59,34.63 71.59,34.51 ; 100.11,39.55 100.1,39.56 ; U4.48 80.86,42.63 80.89,42.65 82.22,42.65 83.46,43.9 v1(83.59,43.9) ; 69.89,48.6 69.89,46.55 70.48,45.96 U4.64 70.48,42.81 70.3,42.63 U4.1 67.59,42.63 66.7,43.52 66.7,45.17 66.44,45.42 66.19,45.42 66.1,45.51 R2.2 ; 71.59,34.51 77.71,34.51 77.98,34.24 U4.32 77.98,30.59 78.62,29.94 C12.1 ; 71.59,34.51 71.59,34.19 71.52,34.12 71.52,34.06 71.48,34.02 U4.19 71.48,31.88 71.91,31.45 71.91,30.57 C15.1 ; 100.11,38.08 100.12,38.07 ; 93.4,51.35 R8.2
  TOP w0.5: v1(66.95,21.16) 66.95,20.53 67.21,20.27 78,20.27 v1(79.27,21.55) ; R7.2 U2.4 ; U2.4 U2.2 ; U2.4 100.1,39.56 ; U2.4 100.1,44.53 98.58,46.06 R6.2 ; v1(87.91,60.15) U13.1 87.91,62.41 86.99,63.33 73.33,63.33 72.41,62.41 U10.1 61.62,62.19 59.97,63.84 57.43,63.84 56.79,63.2 56.79,62.31 U9.1 45.74,62.19 44.22,63.71 41.81,63.71 41.55,63.45 U8.1 41.55,61.17 41.37,60.99 38.81,60.99 37.87,61.93 30.88,61.93 29.36,63.45 27.23,63.45 26.06,62.29 U7.1 23.26,62.06 21.87,63.45 v1(14.76,63.45) ; 100.12,38.07 C7.1 100.12,35.76 100.61,35.28 v1(103.78,35.28) ; R96.1 v1(80.67,25.61) ; v1(117.12,35.9) U11.1 110.26,33.86 v1(107.72,31.32) ; v1(68.6,51.26) v1(83.59,51.26) ; J4.1 91.4,54.69 91.74,55.03 R9.2 92.75,55.03 93.75,54.03 93.75,51.7 93.4,51.35 93.62,51.14 v1(97.31,51.14) ; R85.1 52.66,22.56 55.94,25.85 R63.1 55.94,26.66 56.54,27.26 v1(66.83,27.26) ; 83.45,43.88 C14.1 86.09,43.88 86.48,44.28 96.01,44.28 97.77,46.04 R6.2 ; R6.2 v1(97.77,47.45) ; v1(107.72,28.15) 95.53,28.15 94.64,29.04 v1(94,29.04) v1(80.67,29.04) 79.45,29.04 79.33,28.91 C12.1 ; v1(67.33,25.61) R68.1 ; 100.11,39.55 C8.1 100.11,38.08 ; R74.1 52.86,42.75 54,43.9 54,46.44 54.25,46.69 64.23,46.69 65.41,45.51 R2.2 ; U14.1 v1(107.59,23.07) ; v1(68.6,48.6) 69.89,48.6 ; 94.93,25.61 v1(93.5,25.61)
  BOTTOM w0.254: U6.1 v1(14.76,63.45)
  BOTTOM w0.5: v1(103.78,35.28) 107.72,31.34 v1(107.72,31.32) v1(107.72,28.15) 107.72,27.47 107.59,27.34 v1(107.59,23.07) 108.99,23.07 112.23,19.83 J3.1 ; v1(83.59,51.26) v1(83.59,43.9) ; v1(79.27,21.55) 80.67,22.94 v1(80.67,25.61) v1(80.67,29.04) ; v1(87.91,60.15) 89.05,59.01 89.05,56.09 J4.1 ; v1(94,29.04) 94,26.12 v1(93.5,25.61) ; v1(97.31,51.14) 97.77,50.67 v1(97.77,47.45) ; v1(66.95,21.16) 66.95,24.67 67.33,25.05 v1(67.33,25.61) 67.33,26.75 v1(66.83,27.26) ; U12.1 117.62,36.4 v1(117.12,35.9) ; v1(68.6,48.6) v1(68.6,51.26)
VCC_+5V: length 106.5
  TOP w0.5: R58.2 42.19,45.93 47.27,40.85 51.59,40.85 v1(52.47,39.96) ; v1(100.23,57.23) 89.3,57.23 84.86,52.79 55.52,52.79 v1(54.63,51.9) ; C5.1 108.47,45.27 C6.1 108.24,45.04 U2.3
  TOP w1: U2.3 106.45,46.24 106.83,46.62 106.83,52.53 104.8,54.56
  BOTTOM w0.254: C4.1 101.9,57.23 v1(100.23,57.23)
  BOTTOM w0.5: J2.1 52.41,37.05 52.47,37.11 v1(52.47,39.96) 52.47,49.74 v1(54.63,51.9)
  BOTTOM w1: 104.8,54.56 103.66,55.71 103.15,55.71 102,56.85 C4.1
VCC_+5VREL: length 32
  TOP w0.254: R58.1 RL2.1
  BOTTOM w0.254: RL1.1 29.49,20.91 29.98,21.4 D21.2 29.98,31.98 29.49,32.47 RL3.1 29.49,34.5 30.23,35.24 D25.2 30.23,44.42 29.74,44.91 RL2.1 29.74,46.95 30.11,47.31 D24.2
VCC_+12V: length 50.6
  TOP w1: 125.48,53.04 R39.1 129.21,55.02 129.31,55.12 129.31,56.09 130.32,57.11 132.77,57.11 134.77,59.11 C11.1 134.77,60.8 133.68,61.9 132.83,61.9 131.34,63.38 131.34,63.45 128.98,65.82 128.98,69.93 ; 125.48,53.04 125.12,52.68 125.12,38.94 126.13,37.93 R37.1 ; 125.48,53.04 124.34,54.18 L2.2
VCC_+24V: length 286.1
  TOP w0.254: 72.73,5.36 72.93,5.16 85.69,5.16 ; 72.73,5.36 J20.1 ; 72.73,5.36 72.54,5.16 60.03,5.16 59.78,5.42 J19.1 ; 85.69,5.16 J26.1 ; 85.69,5.16 98.32,5.16 98.77,5.61 J27.1 ; v1(87.53,70.95) 87.53,70.82 ; R14.2 R11.1
  TOP w1: U3.1 119.57,69.93 114.95,74.55 C10.1
  TOP w2: 37.62,71.71 36.87,70.96 21.87,70.96 ; 37.62,71.71 38.5,70.82 52.22,70.82 53.11,71.71 ; 37.62,71.71 37.49,71.84 R22.1 ; R41.1 83.84,72.09 84.22,71.71 ; 84.22,71.71 85.11,70.82 101.53,70.82 104.42,73.71 104.42,76.54 104.47,76.59 J1.2 104.33,79.96 104.33,76.55 106.33,74.55 C10.1 ; 84.22,71.71 83.46,70.95 69.21,70.95 68.45,71.71 ; 53.11,71.71 v1(53.74,71.08) 53.87,70.95 67.69,70.95 68.45,71.71 ; 53.11,71.71 52.86,71.96 R24.1 ; 21.87,70.96 21.87,73.77 R13.1 ; 21.87,70.96 11.4,70.96 8.34,74.02 R11.1 ; 68.45,71.71 68.35,71.81 R26.1
  BOTTOM w0.254: R75.1 R73.1 v1(53.74,71.08)
  BOTTOM w0.5: v1(87.53,70.95) 87.53,62.19 98.77,50.94 J27.1
  BOTTOM w2: J1.2 101.8,77.42 98.92,77.42 96.92,75.42 96.92,73.34
VCC_+REL: length 190.1
  TOP w0.254: 84.39,64.64 R40.1 ; 84.39,64.64 84.61,64.85 94.13,64.85 94.77,64.22 94.77,61.17 v1(96.03,59.9) ; 84.39,64.64 83.84,64.09 71.45,64.09 70.65,64.89 R25.1 69.02,64.89 67.97,63.84 61.36,63.84 60.31,64.89 R23.1 54.47,64.89 53.29,63.71 45.11,63.71 43.8,65.02 R21.1 39.52,63.96 39.27,63.71 31.52,63.71 30.21,65.02 R12.1 16.37,65.02 15.01,66.38 v1(15.01,68.03) 8.86,68.03 7.13,69.76 7.13,70.01 6.79,70.35 R14.1 ; R52.1 113.81,24.59 v1(114.07,24.85) 114.07,26.12 111.04,29.15 101.51,29.15 v1(101.31,29.36) ; v1(123.34,39.2) R36.1
  BOTTOM w0.254: v1(114.07,24.85) 114.96,24.85 119.15,29.04 119.15,36.02 122.32,39.2 v1(123.34,39.2) 126.52,39.2 127.15,39.83 127.15,47.83 126.94,48.05 R38.1 ; v1(15.01,68.03) 15.73,68.03 R10.1 ; v1(96.03,59.9) 100.72,55.21 100.72,29.94 v1(101.31,29.36)
0: length 255.4
  TOP w0.127: R100.1 85.58,12.69 ; R100.1 84.39,12.12 ; R100.1 84.99,13.27 ; R100.1 85.58,12.12 ; R100.1 84.39,13.27 ; R100.1 84.39,12.69 ; R100.1 84.99,12.12 ; R100.1 85.58,13.27 ; 33.7,75.22 Q2.2 ; Q2.2 35.32,74.05 ; Q2.2 34.51,74 ; Q2.2 34.51,75.27 ; Q2.2 35.32,74.63 ; Q2.2 35.32,75.22 ; Q2.2 33.7,74.05 ; Q2.2 33.7,74.63 ; 80.05,75.34 Q5.2 ; Q5.2 81.68,74.17 ; Q5.2 81.68,75.34 ; Q5.2 81.68,74.76 ; Q5.2 80.86,74.12 ; Q5.2 80.05,74.17 ; Q5.2 80.86,75.39 ; Q5.2 80.05,74.76 ; R105.1 98.66,13.27 ; R105.1 98.66,12.12 ; R105.1 98.07,13.27 ; R105.1 97.47,12.69 ; R105.1 97.47,12.12 ; R105.1 97.47,13.27 ; R105.1 98.66,12.69 ; R105.1 98.07,12.12 ; 64.56,74.76 Q4.2 ; Q4.2 65.37,75.39 ; Q4.2 66.18,74.17 ; Q4.2 64.56,74.17 ; Q4.2 65.37,74.12 ; Q4.2 66.18,74.76 ; Q4.2 66.18,75.34 ; Q4.2 64.56,75.34 ; 17.57,74.17 Q1.2 ; Q1.2 18.38,74.12 ; Q1.2 19.19,74.17 ; Q1.2 19.19,75.34 ; Q1.2 17.57,75.34 ; Q1.2 17.57,74.76 ; Q1.2 18.38,75.39 ; Q1.2 19.19,74.76 ; 135.8,40.34 Q7.2 ; Q7.2 135.8,40.93 ; Q7.2 136.62,39.71 ; Q7.2 136.62,40.98 ; Q7.2 137.43,40.34 ; Q7.2 135.8,39.76 ; Q7.2 137.43,40.93 ; Q7.2 137.43,39.76 ; 129.11,24.85 Q6.2 ; Q6.2 130.33,25.67 ; Q6.2 129.69,24.85 ; Q6.2 129.06,25.67 ; Q6.2 129.69,26.48 ; Q6.2 129.11,26.48 ; Q6.2 130.28,26.48 ; Q6.2 130.28,24.85 ; 91.5,65.97 R49.2 ; R49.2 92.69,66.54 ; R49.2 91.5,66.54 ; R49.2 92.69,67.11 ; R49.2 92.69,65.97 ; R49.2 92.1,67.12 ; R49.2 91.5,67.11 ; R49.2 92.1,65.96 ; Q3.2 50,75.27 ; Q3.2 49.19,74.63 ; Q3.2 49.19,74.05 ; Q3.2 50.82,75.22 ; Q3.2 50.82,74.05 ; Q3.2 49.19,75.22 ; Q3.2 50.82,74.63 ; Q3.2 50,74
  TOP w0.254: R32.2 62.01,66.54 62.03,66.52 C26.2 64.22,66.52 65.05,65.69 ; D23.1 111.1,11.77 111.91,12.58 111.91,12.78 111.92,12.79 C31.2 111.92,14.78 111.95,14.81 R55.2 ; J27.3 93.69,8.93 92.64,9.98 91.86,9.98 91.11,10.74 C54.1 91.11,13.53 90.97,13.67 D33.1 ; D32.1 77.89,13.25 78.03,13.12 C52.1 ; 80.54,65 79.07,65 78.25,65.81 C27.2 77.53,66.52 77.5,66.54 R34.2 ; D18.1 120.62,25.74 121.44,26.55 121.44,26.88 121.45,26.89 C28.2 121.45,28.75 121.47,28.78 R45.2 ; J19.3 54.7,9.18 53.65,10.24 52.87,10.24 52.12,10.99 C38.1 52.12,13.37 51.98,13.5 D26.1 ; D12.1 48.21,64.87 47.39,65.68 C25.2 46.66,66.39 46.64,66.41 R30.2 ; D27.1 64.94,13.66 64.32,13.04 ; R72.1 76.01,12.69 77.2,11.51 C52.1 ; 64.32,13.04 63.73,13.04 63.63,12.95 R67.1 ; 64.32,13.04 65.07,12.29 C40.1 65.07,10.74 65.83,9.98 66.6,9.98 67.65,8.93 J20.3 ; C52.1 78.03,10.74 78.78,9.98 79.55,9.98 80.61,8.93 J26.3 ; Q9.1 Q9.2 Q9.3 ; R19.2 31.14,66.41 31.17,66.39 C24.2 32.63,66.39 32.64,66.38 33.8,66.38 34.19,66 D8.1 ; C42.2 v1(47.96,57.68)
  TOP w0.5: D2.1 126.79,66.85 127.28,67.34 U3.3
  TOP w1: U3.5 130.68,71.81 130.71,71.84 ; Q8.2 96.54,78.19 ; Q8.2 Q8.1 95.27,78.06 ; Q8.2 97.81,76.92 97.81,78.19 ; 127.28,72.09 127.28,72.09 U3.3 ; 65.05,66 65.05,65 ; Q9.1 120.04,11.26 ; Q9.3 120.16,8.72 ; C10.2 v1(114.45,68.15) ; 99.84,10.75 99.91,10.81 ; R49.2 92.12,66.52 C30.2 ; Q9.2 120.42,9.99 ; C11.2 134.77,69.04 ; 96.03,65 v1(96.03,63.58)
  BOTTOM w0.127: 120.48,54.49 D19.1 ; D19.1 120.48,53.12 ; D19.1 121.07,54.49 ; D19.1 120.45,53.8 ; D19.1 121.07,53.12 ; D19.1 121.69,53.8 ; D19.1 121.66,54.49 ; D19.1 121.66,53.12 ; R47.2 123.19,51.09 ; R47.2 122.05,49.91 ; R47.2 122.04,50.5 ; R47.2 122.05,51.09 ; R47.2 123.19,50.5 ; R47.2 122.62,49.91 ; R47.2 122.62,51.09 ; R47.2 123.19,49.91 ; 106.49,67.42 107.08,66.84 ; 107.08,66.84 107.08,66.27 ; 107.08,66.84 106.49,66.27 ; 107.08,66.84 107.68,66.27 ; 107.08,66.84 107.08,67.42 ; 107.08,66.84 107.68,66.84 ; 107.08,66.84 107.68,67.42 ; 107.08,66.84 106.49,66.84 ; C2.2 93.63,63.08 ; C2.2 90.57,64.38 ; C2.2 93.63,63.73 ; C2.2 93.63,64.38 ; C2.2 90.57,63.73 ; C2.2 92.1,64.49 ; C2.2 92.1,62.98 ; C2.2 90.57,63.08
  BOTTOM w0.254: R17.2 8.73,67.94 8.63,68.04 C23.2 7.87,68.04 6.35,66.52 D7.1 ; R80.1 45.78,55.07 D29.1 47.03,55.14 47.96,56.07 v1(47.96,57.68) 47.96,62.3 49.92,64.26 R79.2 ; R47.2 122.72,50.6 C29.2
  BOTTOM w1: J20.3 67.65,9.88 68.65,10.88 v1(72.92,10.88) ; C3.2 110.53,66.86 111.82,68.15 v1(114.45,68.15) ; J19.3 54.7,10 55.7,11 v1(60.09,11) ; J26.3 83.28,9.99 v1(84.61,9.99) ; J27.3 96.74,10.37 v1(97.69,10.37)
  BOTTOM w2: C1.2 107.72,72.09
  vias: v1(68.09,68.41) v2(124.12,82.09) v2(124.12,81.09) v2(124.12,80.09) v2(124.12,79.09) v2(124.12,78.09) v2(125.12,82.09) v2(125.12,81.09) v2(125.12,80.09) v2(125.12,79.09) v2(125.12,78.09) v2(126.12,82.09) v2(126.12,81.09) v2(126.12,80.09) v2(126.12,79.09) v2(126.12,78.09) v2(127.12,82.09) v2(127.12,81.09) v2(127.12,80.09) v2(127.12,79.09) v2(127.12,78.09) v2(128.12,82.09) v2(128.12,81.09) v2(128.12,80.09) v2(128.12,79.09) v2(128.12,78.09) v2(129.12,82.09) v2(129.12,81.09) v2(129.12,80.09) v2(129.12,79.09) v2(129.12,78.09) v2(130.12,82.09) v2(130.12,81.09) v2(130.12,80.09) v2(130.12,79.09) v2(130.12,78.09)
A_+5V: length 20.8
  TOP w0.254: R82.2 47.41,10.15 47.25,9.99 R89.2 46.59,9.32 46.61,9.3 J23.1 46.61,6.16 46,5.54 34.44,5.54 33.84,6.14 J22.1
AC_L: length 29.8
  TOP w1: J17.1 6.42,50.76 15.9,50.76 17.3,49.36 17.3,47.57 17.04,47.32 17.04,35.13 16.79,34.87 RL3.3
AC_L1: length 14.6
  TOP w1: 11.96,45.93 11.96,38.69 9.8,36.53 J18.2
AC_L2: length 6.6
  BOTTOM w1: J18.3 9.41,32.57 10.32,33.48 RL3.4
AC_N: length 5
  BOTTOM w2: 5.48,40.49 4.85,41.13 J17.2
ADC_NTC1_IN: length 72.7
  TOP w0.254: R92.2 23.93,11.63 C50.2 21.9,11.63 21.89,11.64 v1(21.49,11.64) ; v1(26.69,29.8) 27.45,29.8 27.71,29.55 72.54,29.55 72.98,29.98 U4.22
  BOTTOM w0.254: v1(26.69,29.8) 26.64,29.8 22.12,25.28 22.12,12.27 v1(21.49,11.64)
ADC_NTC2_IN: length 76.1
  TOP w0.254: v1(20.84,10) C51.2 19.06,10 19.05,9.99 R94.2 ; U4.23 73.48,29.8 72.71,29.04 v1(24.41,29.04)
  BOTTOM w0.254: v1(24.41,29.04) 20.33,24.96 20.33,10.51 v1(20.84,10)
ADC_ORP_IN: length 54.9
  TOP w0.254: v1(34.82,27.89) 35.46,28.53 73.21,28.53 73.98,29.29 U4.24 ; v1(33.68,19.64) 34.49,19.64 34.66,19.47 R84.1
  BOTTOM w0.254: v1(33.68,19.64) 33.17,20.15 33.17,27.01 34.06,27.89 v1(34.82,27.89)
ADC_WATER_IMMERSION_IN: length 43.6
  TOP w0.254: U4.25 74.48,29.07 73.3,27.89 37.23,27.89 36.98,27.64 36.98,26.2
ELECTROLYZER_CTRL: length 49.9
  TOP w0.254: U4.15 77.76,35.63 79.65,33.74 92.48,33.74 95.78,30.44 v1(102.64,30.44) ; v1(103.82,18.37) R53.2
  BOTTOM w0.254: v1(103.82,18.37) 103.27,18.92 103.27,29.8 v1(102.64,30.44)
FLOW_SENSON_IN: length 91.5
  TOP w0.254: J21.2 21.74,62.06 22.76,61.04 24.66,61.04 v1(26.69,59.01) ; U4.14 66.93,36.13 65.95,35.15 63.22,35.15 v1(62.82,34.75) ; v1(62.82,30.69) 53.74,30.69 53.62,30.82 50.2,30.82 50.07,30.94 49.54,30.94 49.42,30.82 v1(32.66,30.82)
  BOTTOM w0.254: v1(26.69,59.01) 32.15,53.55 32.15,31.32 v1(32.66,30.82) ; v1(62.82,34.75) v1(62.82,30.69)
HEATER_LEVEL1_CTRL: length 32.9
  TOP w0.254: 35.92,38.31 53.87,38.31 54.63,39.07 66.06,39.07 66.12,39.13 U4.8
HEATER_LEVEL2_CTRL: length 48.2
  TOP w0.254: U4.9 66.27,38.63 66.25,38.61 65.75,38.61 65.71,38.57 64.82,38.57 64.81,38.56 55.39,38.56 54.38,37.55 39.01,37.55 38.12,36.66 v1(35.84,36.66) ; v1(35.84,48.98) 36.43,49.57 R59.1
  BOTTOM w0.254: v1(35.84,48.98) 35.2,48.34 35.2,37.29 v1(35.84,36.66)
LCD_RX: length 28
  TOP w0.254: v1(49.81,30.31) 50.37,30.31 50.63,30.04 67.87,30.04 70.48,32.64 U4.17
  BOTTOM w0.254: J2.2 49.87,31.31 49.81,31.25 v1(49.81,30.31)
LCD_TX: length 30.1
  TOP w0.254: v1(47.39,31.7) 53.36,31.7 53.82,31.25 62.49,31.25 62.56,31.32 63.09,31.32 63.16,31.25 63.34,31.25 63.9,30.69 v1(66.83,30.69) ; v1(66.83,34.75) 66.83,34.87 67.08,35.13 U4.16
  BOTTOM w0.254: J2.3 47.33,33.88 47.39,33.82 v1(47.39,31.7) ; v1(66.83,34.75) v1(66.83,30.69)
LED1: length 13.4
  TOP w0.254: U4.44 82.1,40.63 82.45,40.98 88.92,40.98 90.7,42.75 D4.1
LIQUID_SENSOR_1: length 2.3
  TOP w0.254: J19.2 57.24,8.92 57.05,9.12 R64.2
LIQUID_SENSOR_1_IN: length 33.6
  TOP w0.254: C39.1 60.98,25.03 60.94,25.07 R66.2 65.3,25.86 66.05,26.61 74.43,26.61 v1(74.83,27.01) ; U4.55 74.98,42.32 74.83,42.17 v1(74.83,41.61)
  BOTTOM w0.254: v1(74.83,27.01) v1(74.83,41.61)
LIQUID_SENSOR_2: length 2.3
  TOP w0.254: R69.2 70,8.67 70.19,8.48 J20.2
LIQUID_SENSOR_2_IN: length 22
  TOP w0.254: C41.1 73.94,24.9 73.9,24.94 R71.2 v1(75.08,25.61) ; U4.54 75.48,41.6 75.53,41.54 v1(75.53,40.85)
  BOTTOM w0.254: v1(75.53,40.85) 75.53,40.29 75.59,40.24 75.59,26.12 v1(75.08,25.61)
LIQUID_SENSOR_3: length 2.3
  TOP w0.254: R97.2 82.95,8.67 83.15,8.48 J26.2
LIQUID_SENSOR_3_IN: length 31.4
  TOP w0.254: U4.53 75.98,41.98 76.22,41.74 v1(76.22,40.21) ; v1(76.86,26.12) 79.65,26.12 80.16,26.62 86.5,26.62 86.85,26.28 R99.2 86.85,24.82 86.89,24.78 C53.1
  BOTTOM w0.254: v1(76.86,26.12) 76.22,26.75 v1(76.22,40.21)
LIQUID_SENSOR_4: length 2.3
  TOP w0.254: J27.2 96.23,8.48 96.03,8.67 R102.2
LIQUID_SENSOR_4_IN: length 43.6
  TOP w0.254: v1(76.98,39.71) 76.98,41.99 76.48,42.5 U4.52 ; v1(76.98,27.26) 99.68,27.26 99.93,27.01 R104.2 99.93,24.94 99.97,24.9 C55.1
  BOTTOM w0.254: v1(76.98,27.26) v1(76.98,39.71)
OSC_IN: length 12.4
  TOP w0.254: U4.5 66.29,40.63 65.81,41.1 64.37,41.1 61.59,43.88 C16.2 58.2,43.88 58.19,43.9 Y1.1
OSC_OUT: length 19.1
  TOP w0.254: C17.2 59.65,34.51 59.64,34.5 v1(59.08,34.5) Y1.2 ; U4.6 66.02,40.13 65.55,40.59 v1(59.08,40.59)
  BOTTOM w0.254: v1(59.08,34.5) v1(59.08,40.59)
POWER_DETEC: length 34.1
  TOP w0.254: U4.51 v1(76.98,46.06) ; v1(76.98,50.37) 55.99,50.37 51.83,46.21 C43.1 51.83,44.89 R78.2
  BOTTOM w0.254: v1(76.98,46.06) 76.98,48.81 76.98,48.82 v1(76.98,50.37)
PUMP_1_CTRL: length 36.2
  TOP w0.254: U4.36 83.62,36.63 84.48,35.77 92.61,35.77 96.29,32.09 103.78,32.09 105.31,30.56 112.6,30.56 113.35,31.31 R42.2
PUMP_2_CTRL: length 33.4
  TOP w0.254: v1(87.4,35.13) 84.22,35.13 83.23,36.13 U4.35 ; v1(88.03,57.74) 88.71,58.41 R44.2
  BOTTOM w0.254: v1(87.4,35.13) 87.45,35.13 88.03,35.72 v1(88.03,57.74)
PUMP_3_CTRL: length 60
  TOP w0.254: v1(31.27,31.83) 31.9,32.47 53.52,32.47 54.28,31.7 62.3,31.7 62.37,31.78 63.28,31.78 63.35,31.7 63.65,31.7 64.14,31.22 65.95,31.22 66.31,31.58 67.97,31.58 v1(68.86,32.47) ; v1(70,36.91) 77.49,36.91 78.78,35.63 U4.34 ; v1(31,28.15) 31,27.59 31.27,27.32 R54.1
  BOTTOM w0.254: v1(31.27,31.83) 30.87,31.44 30.87,28.83 31,28.71 v1(31,28.15) ; v1(68.86,32.47) 70,33.61 v1(70,36.91)
PUMP_4_CTRL: length 54.9
  TOP w0.254: U4.33 83.09,35.13 83.77,34.45 92.41,34.45 92.62,34.24 93.11,34.24 96.03,31.32 103.9,31.32 105.12,30.1 105.13,30.1 105.43,29.8 v1(115.59,29.8)
  BOTTOM w0.254: v1(115.59,29.8) 115.59,45.82 115.34,46.08 R43.2
PUMP_+5V: length 4.5
  TOP w2: RL1.4 9.06,19.89 J13.1
SWCLK: length 21.7
  TOP w0.254: U4.49 77.98,45.65 78,45.67 v1(78,46.06) ; v1(78,50.37) 88.67,50.37 J4.2 91.63,53.33 R9.1
  BOTTOM w0.254: v1(78,46.06) 78,46.61 77.98,46.64 77.98,49.71 78,49.74 v1(78,50.37)
SWDIO: length 19.4
  TOP w0.254: J4.3 91.4,49.61 91.44,49.65 R8.1 ; U4.46 80.86,41.63 81.01,41.48 87.78,41.48 v1(88.8,42.5)
  BOTTOM w0.254: J4.3 88.8,47.96 v1(88.8,42.5)
TDS_RX: length 57
  TOP w0.254: v1(103.27,33.99) 102.64,34.63 97.18,34.63 v1(96.03,35.77) ; v1(96.03,39.07) 95.14,39.07 94.53,39.68 94.43,39.68 94.15,39.96 82.95,39.96 82.62,39.63 U4.42
  BOTTOM w0.254: J3.2 109.69,15.13 106.46,18.36 106.46,30.8 v1(103.27,33.99) ; v1(96.03,39.07) v1(96.03,35.77)
TDS_TX: length 56.3
  TOP w0.254: v1(95.18,40.14) 94.62,40.14 94.29,40.47 82.7,40.47 82.36,40.13 U4.43 ; v1(102,33.86) 96.67,33.86 v1(95.65,34.88)
  BOTTOM w0.254: v1(102,33.86) 105.7,30.17 105.7,8.9 J3.3 ; v1(95.18,40.14) 95.18,35.36 v1(95.65,34.88)
VALVE_1_CTRL: length 93.7
  TOP w0.254: U4.41 83.72,39.13 83.79,39.2 v1(84.35,39.2) ; v1(82.95,54.06) 47.39,54.06 44.98,56.47 42.57,56.47 40.79,58.25 29.99,58.25 29.11,57.36 27.96,57.36 27.07,58.25 v1(13.36,58.25)
  BOTTOM w0.254: v1(84.35,39.2) 84.35,39.76 84.49,39.9 84.49,53.66 84.1,54.06 v1(82.95,54.06) ; R15.2 13.19,58.41 v1(13.36,58.25)
VALVE_2_CTRL: length 79.9
  TOP w0.254: v1(84.22,55.07) 47.39,55.07 45.36,57.11 42.7,57.11 40.93,58.87 29.19,58.87 28.61,58.29 R16.2 ; v1(85.52,38.88) 84.96,38.88 84.94,38.86 84.91,38.86 84.61,38.56 84.09,38.56 84.02,38.63 U4.40
  BOTTOM w0.254: v1(85.52,38.88) 85.52,53.78 v1(84.22,55.07)
VALVE_3_CTRL: length 66.3
  TOP w0.254: v1(84.61,56.1) 47.38,56.1 45.2,58.29 R27.2 ; v1(86,38.17) 85.23,38.17 85.19,38.13 84.82,38.13 84.8,38.11 83.9,38.11 83.88,38.13 U4.39
  BOTTOM w0.254: v1(84.61,56.1) 86.4,54.31 86.4,38.56 v1(86,38.17)
VALVE_4_CTRL: length 54
  TOP w0.254: R28.2 59.47,58.41 60.91,56.98 v1(85.37,56.98) ; U4.38 84.91,37.63 85.07,37.46 v1(86.61,37.46)
  BOTTOM w0.254: v1(86.61,37.46) 87,37.85 87,56.11 86.13,56.98 v1(85.37,56.98)
VALVE_5_CTRL: length 40.6
  TOP w0.254: R29.2 75.62,58.41 75.63,58.42 85.7,58.42 v1(86.26,57.87) ; U4.37 84.76,37.13 85.1,36.78 v1(87.14,36.78)
  BOTTOM w0.254: v1(87.14,36.78) 87.54,37.18 87.54,56.58 v1(86.26,57.87)
N1202581: length 24.1
  TOP w0.5: D2.2 123.44,65.4 125.58,67.53 U3.2
  TOP w1: D2.2 121.82,63.48 121.82,63.45 112.55,54.18 L2.1
N16762968: length 4.8
  TOP w0.254: R3.1 74.41,47.8 72.48,45.87 U4.60
N16765775: length 1.6
  TOP w0.254: R6.1 D3.2
N16765835: length 1.7
  TOP w0.254: 94.38,42.75 R7.1
N16766298: length 11.5
  BOTTOM w1: L1.1 96.47,68.28 94.92,66.73 C2.1
  BOTTOM w2: C1.1 98.94,72.09 D1.1 96.92,68.54 L1.1
N16766318: length 22.5
  BOTTOM w1: 101.88,64.72 U1.2 ; 101.88,64.72 101.88,61.53 103.38,60.03 107.21,60.03 109.75,62.57 C3.1 ; 101.88,64.72 98.76,64.72 98,65.48 L1.2
N16766426: length 4.7
  BOTTOM w1: 104.8,62.19 106.22,62.19 107.08,63.04 R1.2
N16766430: length 2.9
  BOTTOM w1: U1.7 102.36,49.48 C9.1
N16767366: length 7.5
  TOP w0.254: R2.1 65.22,43.6 v1(65.22,42.93) ; v1(65.22,39.71) 65.78,39.71 65.86,39.63 U4.7
  BOTTOM w0.254: v1(65.22,39.71) v1(65.22,42.93)
N16771027: length 7.8
  TOP w2: J6.1 26.05,76.89 R13.2
  BOTTOM w2: D6.2 26.16,77.6 J6.1
N16771125: length 2.6
  TOP w0.254: U7.6 26.06,68.13 25.47,67.54 25.24,67.54 25,67.3 24.87,67.3 24.3,66.72 R12.2
N16771129: length 8
  TOP w2: Q2.3 31.79,76.92 31.41,77.3 J6.2
  BOTTOM w2: D6.1 29.51,77.85 J6.2
N16771225: length 2.1
  TOP w0.254: U7.3 R16.1
N16771233: length 8.4
  TOP w0.254: D8.2 32.88,68.14 32.63,67.89 C24.1 ; C24.1 32.15,68.14 v1(32.15,68.92) ; C24.1 31.15,67.89 30.92,68.11 R19.1 29.58,68.11 29.34,68.36 U7.4
  BOTTOM w0.254: R20.1 32.53,69.3 v1(32.15,68.92)
N16771535: length 5
  TOP w0.254: Q2.1 32.34,74.38 v1(31.01,74.38)
  BOTTOM w0.254: v1(31.01,74.38) 30.88,74.25 30.88,73.43 32.52,71.8 R20.2
N16774684: length 7.9
  TOP w1: R26.2 71.01,77.02 71.29,77.3 J9.1
  BOTTOM w1: D11.2 72.51,77.6 J9.1
